# Altium PCB STM32.PcbDoc (part 5 of 10)
Units mil, origin at the board's own origin, x right, y up, seen from the top; angles counter-clockwise.
Board outline 3925 x 3925 mil, 2 copper layers (Top Layer, Bottom Layer); 152 components, 142 nets, 670 pads, 189 vias.
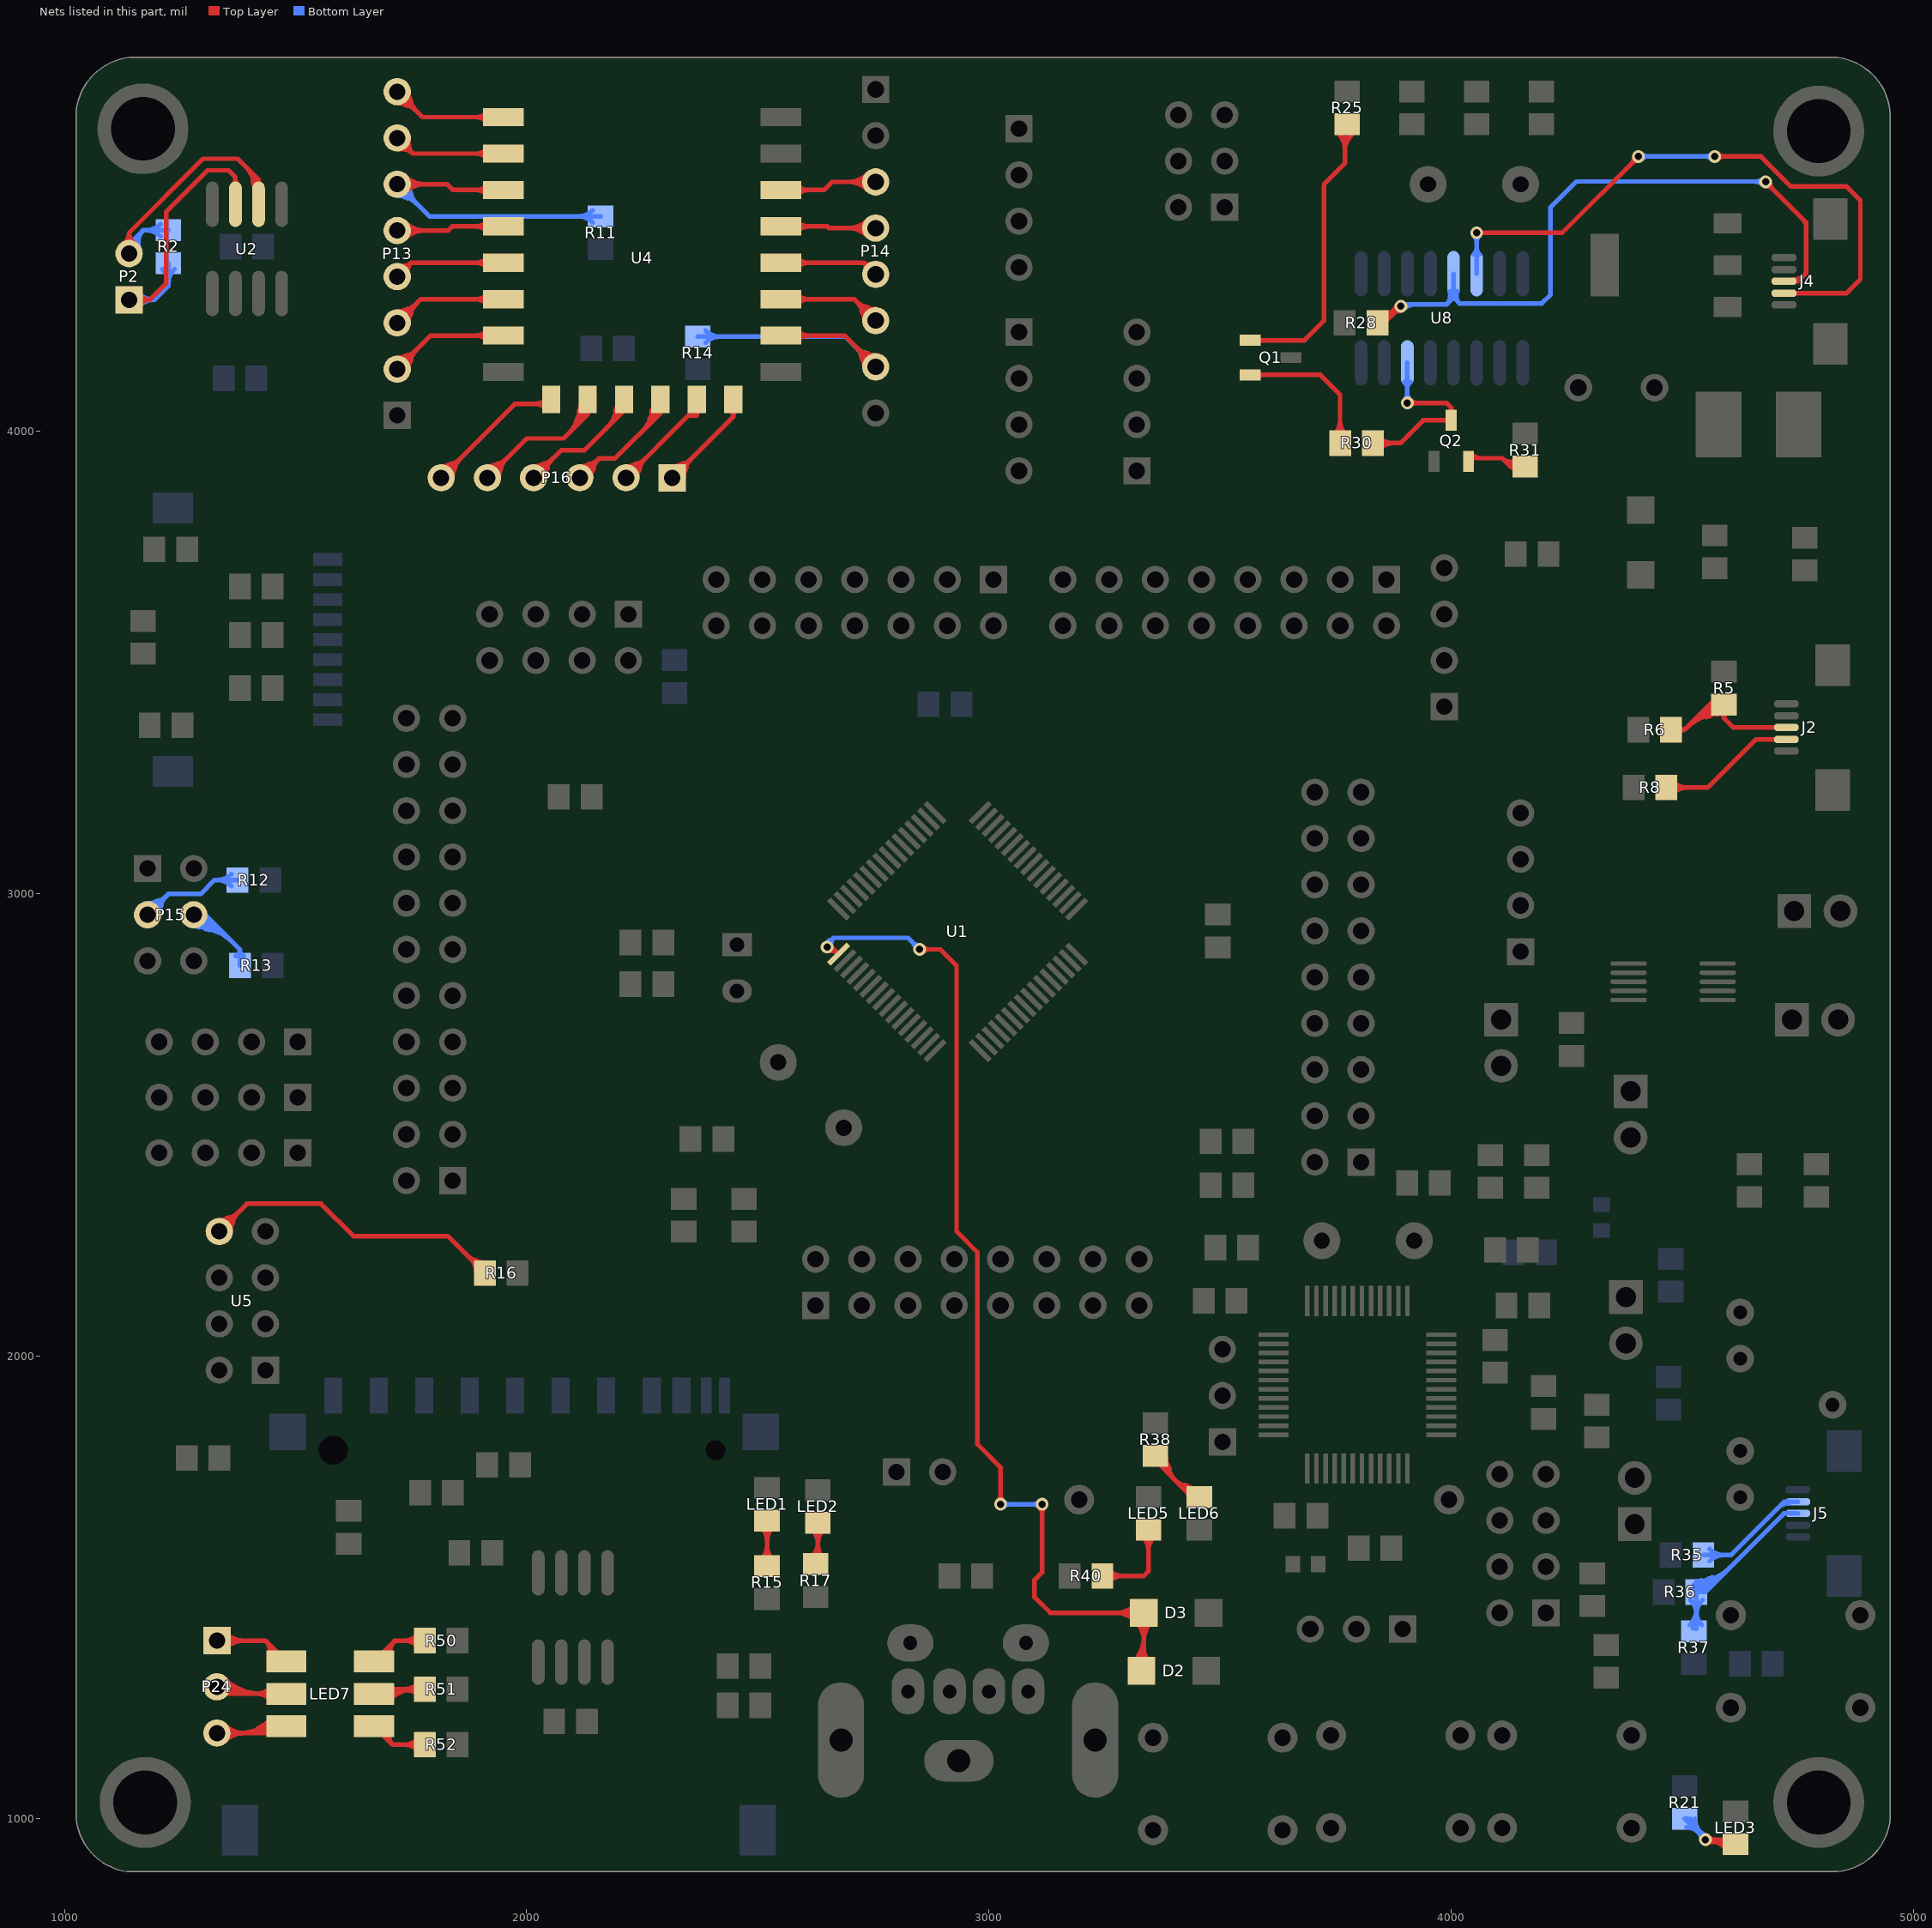
[diagram p5: the nets of this part, all layers, seen from the top]

## Via types
v1: diameter 27.56, hole 15.75, Top Layer to Bottom Layer, tented both sides, 185 vias
v2: diameter 39.37, hole 23.62, Top Layer to Bottom Layer, tented both sides, 3 vias
v3: diameter 39.37, hole 27.56, Top Layer to Bottom Layer, tented both sides, 1 vias

## Nets (pads, with @x,y where several pads share a name; then routed paths per layer and width w, separated by ;. In a path a pad name is that pad's centre, name@x,y a point inside that pad or via, vN(x,y) a via of type N, cw(c..) or ccw(c..) an arc to the next point about the centre after c; other vN are vias at no path point) (continued)
NetD2_2: D2.2 D3.2 U1.1 | length 3548.3
  Top Layer w10: v1@2649.12,2884.16 ccw(c2667.97,2902.07) 2667.3,2876.07 ; v1(2650,2885) 2660,2885 U1.1@2675,2870 ; v1(2850,2880) 2895,2880 2930,2845 2930,2270 2975,2225 2975,1810 3025,1760 v1(3025,1680) ; v1@2856.21,2873.79 cw(c2871.2,2858.8) 2871.2,2880 cw(c2871.2,2901.2) v1@2856.21,2886.21 ; v1(3115,1680) 3115,1532.52 3098.74,1516.26 3098.74,1479.12 3132.86,1445 D3.2@3335,1445 3335,1325 D2.2@3330,1320 ; U1.1@2675,2870 ccw(c2657.76,2852.76) 2652.05,2876.46 cw(c2657.76,2852.76) U1.1@2675,2870 ; 3025,1701.2 ccw(c3046.2,1701.2) 3031.21,1686.21 cw(c3046.2,1701.2) 3025,1701.2 ; 3025,1701.2 cw(c3003.8,1701.2) 3018.79,1686.21 ccw(c3003.8,1701.2) 3025,1701.2 ; 3115,1658.8 ccw(c3093.8,1658.8) 3108.79,1673.79 cw(c3093.8,1658.8) 3115,1658.8 ; 3115,1658.8 cw(c3136.2,1658.8) 3121.21,1673.79 ccw(c3136.2,1658.8) 3115,1658.8 ; 3274.64,1445 ccw(c3274.64,1505.36) 3317.32,1462.68 cw(c3274.64,1505.36) 3274.64,1445 ; 3274.64,1445 cw(c3274.64,1384.64) D3.2@3317.32,1427.32 ; 3274.64,1445 cw(c3274.64,1384.64) D3.2@3317.32,1427.32 ; 3298.79,1445 ccw(c3298.79,1481.21) 3324.39,1455.61 cw(c3298.79,1481.21) 3298.79,1445 ; 3298.79,1445 cw(c3298.79,1408.79) D3.2@3324.39,1434.39 ; 3298.79,1445 cw(c3298.79,1408.79) D3.2@3324.39,1434.39 ; D3.2@3317.32,1427.32 cw(c3274.64,1384.64) 3335,1384.64 ; D3.2@3317.32,1427.32 cw(c3274.64,1384.64) 3335,1384.64 ; D3.2@3324.39,1434.39 cw(c3298.79,1408.79) 3335,1408.79 ; D3.2@3324.39,1434.39 cw(c3298.79,1408.79) 3335,1408.79 ; 3335,1368.28 ccw(c3378.28,1368.28) 3347.68,1337.68 cw(c3378.28,1368.28) 3335,1368.28 ; 3335,1368.28 cw(c3281.72,1368.28) 3319.39,1330.61 ccw(c3281.72,1368.28) 3335,1368.28 ; 3335,1384.64 cw(c3395.36,1384.64) 3352.68,1427.32 ccw(c3395.36,1384.64) 3335,1384.64 ; 3335,1408.79 cw(c3371.21,1408.79) 3345.61,1434.39 ccw(c3371.21,1408.79) 3335,1408.79 ; D2.2@3312.32,1337.68 ccw(c3257.57,1392.43) 3335,1392.43 cw(c3257.57,1392.43) D2.2@3312.32,1337.68
  Bottom Layer w10: v1@2648.78,2885 cw(c2669.98,2885) 2654.99,2899.99 ; v1(2650,2885) 2650,2895 v1@2651.62,2896.62 ; v1@2653.76,2894.49 2664.27,2905 ; v1@2658.62,2886.65 cw(c2678.77,2890.5) 2664.27,2905 ; v1@2841.22,2880 ccw(c2820.02,2880) 2835.01,2894.99 ccw(c2850,2909.98) v1@2850,2888.78 ; v1(2850,2880) 2825,2905 2664.27,2905 ; v1(3025,1680) v1(3115,1680) ; 3046.2,1680 ccw(c3046.2,1658.8) 3031.21,1673.79 cw(c3046.2,1658.8) 3046.2,1680 ; 3046.2,1680 cw(c3046.2,1701.2) 3031.21,1686.21 ccw(c3046.2,1701.2) 3046.2,1680 ; 3093.8,1680 ccw(c3093.8,1701.2) 3108.79,1686.21 cw(c3093.8,1701.2) 3093.8,1680 ; 3093.8,1680 cw(c3093.8,1658.8) 3108.79,1673.79 ccw(c3093.8,1658.8) 3093.8,1680
NetJ2_2: J2.2 R8.2 | length 444.1
  Top Layer w10: R8.2@4465.43,3230 4555,3230 4659.41,3334.41 J2.2@4725,3334.41 ; 4510.39,3230 ccw(c4510.39,3185.04) 4478.6,3216.83 cw(c4510.39,3185.04) 4510.39,3230 ; 4510.39,3230 cw(c4510.39,3274.96) 4478.6,3243.17 ccw(c4510.39,3274.96) 4510.39,3230
NetJ2_3: J2.3 R5.2 R6.2 | length 1092
  Top Layer w10: R6.2@4475.43,3355 4505,3355 ; 4551.44,3391.67 ccw(c4540.4,3432.84) R5.2@4578.38,3413.48 ; 4551.52,3382.15 ccw(c4537.14,3438.63) R5.2@4587.25,3408.86 ; R5.2@4564.22,3395.09 cw(c4568.49,3379.13) R5.2@4576.75,3393.44 ; R5.2@4567.91,3413.73 cw(c4554.37,3416.84) 4557.97,3403.42 cw(c4561.08,3391.78) R5.2@4570.89,3398.77 ; R5.2@4574.92,3388.11 ccw(c4566.49,3421.19) R5.2@4595.85,3403.75 ; J2.3@4725,3360 4610,3360 4590,3380 ; 4505,3355 ccw(c4505,3340.84) 4492.23,3346.96 cw(c4505,3340.84) 4505,3355 ; 4505,3355 cw(c4505,3369.16) 4492.23,3363.05 ccw(c4505,3369.16) 4505,3355 ; 4505,3355 4559.56,3409.57 ; 4559.57,3409.57 ccw(c4559.57,3419.11) 4568.54,3415.88 cw(c4559.57,3419.11) 4559.57,3409.57 ; 4559.57,3409.57 cw(c4559.57,3400.02) 4568.54,3403.26 ccw(c4559.57,3400.02) 4559.57,3409.57 ; 4559.56,3409.57 R5.2@4590,3409.57 4590,3380 ; 4590,3380 ccw(c4575.84,3380) 4581.96,3392.77 cw(c4575.84,3380) 4590,3380 ; 4590,3380 cw(c4604.16,3380) 4598.05,3392.77 ccw(c4604.16,3380) 4590,3380 ; 4509.04,3359.04 cw(c4586.06,3282.01) 4586.06,3390.94 ccw(c4586.06,3282.01) 4509.04,3359.04 ; 4526.11,3376.11 cw(c4586.06,3316.15) 4586.06,3400.94 ccw(c4586.06,3316.15) 4526.11,3376.11 ; 4543.18,3393.18 cw(c4586.06,3350.29) 4586.06,3410.94 ccw(c4586.06,3350.29) 4543.18,3393.18 ; 4560.25,3410.25 cw(c4586.06,3384.43) 4586.06,3420.94 ccw(c4586.06,3384.43) 4560.25,3410.25
NetJ4_2: J4.2 U8.6 | length 1789.7
  Top Layer w10: v1(4055,4430) 4240,4430 v1(4405,4595) ; 4393.77,4585.85 cw(c4407.64,4582.13) v1@4404.76,4596.2 ; v1(4570,4595) 4670,4595 4735,4530 4855,4530 4885,4500 4885,4329.41 4855,4299.41 J4.2@4720,4299.41 ; 4390.01,4580.01 ccw(c4375.02,4595) 4396.22,4595 cw(c4375.02,4595) 4390.01,4580.01 ; 4390.01,4580.01 cw(c4405,4565.02) 4405,4586.22 ccw(c4405,4565.02) 4390.01,4580.01 ; 4591.2,4595 ccw(c4591.2,4573.8) 4576.21,4588.79 cw(c4591.2,4573.8) 4591.2,4595 ; 4591.2,4595 cw(c4591.2,4616.2) 4576.21,4601.21 ccw(c4591.2,4616.2) 4591.2,4595
  Bottom Layer w10: U8.6@4055,4341.46 v1(4055,4430) ; v1(4405,4595) v1(4570,4595) ; 4055,4398.08 ccw(c4076.2,4398.08) 4061.21,4383.1 cw(c4076.2,4398.08) 4055,4398.08 ; 4055,4398.08 cw(c4033.8,4398.08) 4048.79,4383.1 ccw(c4033.8,4398.08) 4055,4398.08 ; 4055,4408.8 ccw(c4033.8,4408.8) 4048.79,4423.79 cw(c4033.8,4408.8) 4055,4408.8 ; 4055,4408.8 cw(c4076.2,4408.8) 4061.21,4423.79 ccw(c4076.2,4408.8) 4055,4408.8 ; 4426.2,4595 ccw(c4426.2,4573.8) 4411.21,4588.79 cw(c4426.2,4573.8) 4426.2,4595 ; 4426.2,4595 cw(c4426.2,4616.2) 4411.21,4601.21 ccw(c4426.2,4616.2) 4426.2,4595 ; 4548.8,4595 ccw(c4548.8,4616.2) 4563.79,4601.21 cw(c4548.8,4616.2) 4548.8,4595 ; 4548.8,4595 cw(c4548.8,4573.8) 4563.79,4588.79 ccw(c4548.8,4573.8) 4548.8,4595
NetJ4_3: J4.3 R28.1 U8.5 | length 2652
  Top Layer w10: R28.1@3831.97,4246.55 cw(c3857.21,4223.84) R28.1@3855.42,4257.74 ; R28.1@3840.43,4235 3840.43,4248 3868,4248 v1(3891,4271) ; 3870.37,4252.23 cw(c3887.95,4242.08) v1@3890.08,4262.27 ; 3874.59,4259.53 cw(c3882.71,4254.84) v1@3886.99,4263.19 ; 3878.07,4265.56 cw(c3889.72,4258.84) v1@3891.13,4272.21 ; 3879.77,4261.85 cw(c3893.64,4258.13) v1@3890.76,4272.2 ; 3881.85,4259.77 ccw(c3878.13,4273.64) v1@3892.2,4270.76 ; v1@4678.8,4539.76 ccw(c4692.87,4542.64) 4689.15,4528.77 ; v1(4680,4540) 4765,4455 4765,4452.21 ; v1@4680.24,4541.2 cw(c4677.36,4527.13) 4691.23,4530.85 ; J4.3@4720,4325 4750,4325 4767.33,4342.33 4767.33,4452.21 ; J4.3@4741.19,4323.56 cw(c4755.41,4315.35) 4751.16,4331.21 ; 3865.06,4250.51 ccw(c3846.32,4282.97) v1@3882.52,4273.27 ; 3865.06,4250.51 ccw(c3846.32,4282.97) v1@3882.52,4273.27 ; 3865.06,4250.51 ccw(c3846.32,4282.97) v1@3882.52,4273.27 ; 3872.64,4260.4 ccw(c3862.04,4278.76) v1@3882.52,4273.27 ; 3872.65,4260.4 cw(c3883.24,4242.05) v1@3888.73,4262.52 ; 3872.64,4260.4 ccw(c3862.04,4278.76) v1@3882.52,4273.27 ; 3872.65,4260.4 cw(c3883.24,4242.05) v1@3888.73,4262.52 ; 3872.64,4260.4 ccw(c3862.04,4278.76) v1@3882.52,4273.27 ; 3872.65,4260.4 cw(c3883.24,4242.05) v1@3888.73,4262.52 ; 3875.58,4256.59 ccw(c3868.79,4268.36) v1@3882.28,4269.96 ; 3875.58,4256.59 ccw(c3868.79,4268.36) v1@3882.28,4269.96 ; 3875.58,4256.59 ccw(c3868.79,4268.36) v1@3882.28,4269.96 ; 3876.01,4256.01 ccw(c3861.02,4271) 3882.22,4271 cw(c3861.02,4271) 3876.01,4256.01 ; 3876.01,4256.01 cw(c3891,4241.02) 3891,4262.22 ccw(c3891,4241.02) 3876.01,4256.01 ; v1(3891,4271) cw(c3854.89,4307.1) 3844.3,4257.15 ccw(c3854.89,4307.1) v1(3891,4271) ; 4694.99,4525.01 ccw(c4680,4510.02) 4680,4531.22 cw(c4680,4510.02) 4694.99,4525.01 ; 4694.99,4525.01 cw(c4709.98,4540) 4688.78,4540 ccw(c4709.98,4540) 4694.99,4525.01 ; R28.1@3840.15,4237.59 ccw(c3845.77,4264.11) 3864.94,4244.94 cw(c3845.77,4264.11) R28.1@3840.15,4237.59 ; R28.1@3842.22,4247.37 ccw(c3850.33,4285.61) 3877.97,4257.97 cw(c3850.33,4285.61) R28.1@3842.22,4247.37 ; R28.1@3853.6,4252.1 ccw(c3863.51,4262.01) 3863.51,4248 cw(c3863.51,4262.01) R28.1@3853.6,4252.1 ; J4.3@4738.7,4327.87 ccw(c4738.7,4362.09) 4762.9,4337.9 cw(c4738.7,4362.09) J4.3@4738.7,4327.87
  Bottom Layer w10: v1(3891,4271) 3895,4275 3990,4275 ; 3997.58,4288.02 cw(c4023.54,4289.58) U8.5@4004.09,4306.83 ; U8.5@4005,4341.46 4005,4290 ; v1@4680,4541 4271,4541 4215,4485 4215,4296 4196,4277 4018,4277 ; 3990,4275 ccw(c3970.48,4294.52) 3996.67,4303.25 cw(c3970.48,4294.52) 3990,4275 ; 3990,4275 4005,4290 ; 4005,4290 ccw(c3994.77,4290) 4000.28,4298.62 cw(c3994.77,4290) 4005,4290 ; 4005,4290 cw(c4015.23,4290) 4009.72,4298.62 ccw(c4015.23,4290) 4005,4290 ; 4005,4290 4018,4277 ; 4018,4277 cw(c4034.42,4293.43) 4013.07,4302.57 ccw(c4034.42,4293.43) 4018,4277 ; v1@3897.21,4264.79 cw(c3921.85,4240.15) 3921.85,4275 ccw(c3921.85,4240.15) v1@3897.21,4264.79 ; 4001.44,4286.44 ccw(c3987.65,4300.24) 4006.16,4306.41 cw(c3987.65,4300.24) 4001.44,4286.44 ; U8.5@4003.88,4306.5 ccw(c4019.79,4299.69) 4007.55,4287.45 cw(c4019.79,4299.69) U8.5@4003.88,4306.5 ; 4656.39,4541 cw(c4656.39,4516.39) 4673.79,4533.79 ccw(c4656.39,4516.39) 4656.39,4541 ; 4661.22,4541 ccw(c4661.22,4558.78) 4673.79,4546.21 cw(c4661.22,4558.78) 4661.22,4541
NetJ5_2: J5.2 R35.1 | length 458.1
  Bottom Layer w10: R35.1@4545.43,1570 4605,1570 4720.59,1685.59 J5.2@4750,1685.59 ; 4718.84,1679.38 ccw(c4714.59,1695.24) J5.2@4728.81,1687.03 ; 4590.39,1570 ccw(c4590.39,1525.04) 4558.6,1556.83 cw(c4590.39,1525.04) 4590.39,1570 ; 4590.39,1570 cw(c4590.39,1614.96) 4558.6,1583.17 ccw(c4590.39,1614.96) 4590.39,1570 ; 4708.11,1673.11 cw(c4731.3,1649.92) 4731.3,1682.72 ccw(c4731.3,1649.92) 4708.11,1673.11
NetJ5_3: J5.3 R36.1 R37.1 | length 1191
  Bottom Layer w10: R36.1@4520.57,1499.62 cw(c4549.94,1482.7) R36.1@4541.17,1515.44 ; R36.1@4529.24,1494.62 cw(c4579.46,1465.7) 4564.46,1521.68 ; R37.1@4530.43,1410.87 R36.1@4530.43,1490 4549.72,1490 4719.72,1660 J5.3@4750,1660 ; R36.1@4538.31,1490.44 cw(c4572.16,1475.4) 4562.57,1511.17 ; R36.1@4539.74,1510.06 ccw(c4548.01,1524.37) R36.1@4552.28,1508.41 ; R36.1@4547.03,1502.39 ccw(c4552.88,1505.37) 4554.58,1499.03 ccw(c4556.54,1491.71) R36.1@4548.99,1492.35 ; 4530.43,1441.11 ccw(c4485.48,1441.11) 4517.27,1472.9 cw(c4485.48,1441.11) 4530.43,1441.11 ; 4530.43,1441.11 cw(c4575.39,1441.11) 4543.6,1472.9 ccw(c4575.39,1441.11) 4530.43,1441.11 ; R37.1@4515.77,1418.6 ccw(c4480.37,1454.01) 4530.43,1454.01 cw(c4480.37,1454.01) R37.1@4515.77,1418.6 ; R37.1@4522.84,1411.53 ccw(c4504.51,1429.86) 4530.43,1429.86 cw(c4504.51,1429.86) R37.1@4522.84,1411.53 ; 4530.43,1446.78 ccw(c4570.28,1446.78) 4542.1,1418.6 cw(c4570.28,1446.78) 4530.43,1446.78 ; R36.1@4530.43,1492.56 ccw(c4530.43,1545.3) 4567.73,1508.01 cw(c4530.43,1545.3) R36.1@4530.43,1492.56 ; R36.1@4530.43,1502.56 ccw(c4530.43,1579.44) 4584.8,1525.08 cw(c4530.43,1579.44) R36.1@4530.43,1502.56 ; R36.1@4530.43,1512.56 ccw(c4530.43,1613.58) 4601.87,1542.15 cw(c4530.43,1613.58) R36.1@4530.43,1512.56
NetLED1_1: LED1.1 R15.2 | length 381.2
  Top Layer w10: R15.2@2520,1545.87 LED1.1@2520,1644.57 ; 2520,1590.82 ccw(c2564.96,1590.82) 2533.17,1559.03 cw(c2564.96,1590.82) 2520,1590.82 ; 2520,1590.82 cw(c2475.04,1590.82) 2506.83,1559.03 ccw(c2475.04,1590.82) 2520,1590.82 ; 2520,1599.61 ccw(c2475.04,1599.61) 2506.83,1631.4 cw(c2475.04,1599.61) 2520,1599.61 ; 2520,1599.61 cw(c2564.96,1599.61) 2533.17,1631.4 ccw(c2564.96,1599.61) 2520,1599.61
NetLED2_1: LED2.1 R17.2 | length 366.6
  Top Layer w10: R17.2@2630,1555.43 LED2.1@2630,1639.57 ; 2630,1594.61 ccw(c2585.04,1594.61) 2616.83,1626.4 cw(c2585.04,1594.61) 2630,1594.61 ; 2630,1594.61 cw(c2674.96,1594.61) 2643.17,1626.4 ccw(c2674.96,1594.61) 2630,1594.61 ; R17.2@2615.77,1563.6 ccw(c2581.41,1597.96) 2630,1597.96 cw(c2581.41,1597.96) R17.2@2615.77,1563.6 ; 2630,1592.83 ccw(c2671.33,1592.83) 2642.1,1563.6 cw(c2671.33,1592.83) 2630,1592.83
NetLED3_1: LED3.1 R21.2 | length 1301.5
  Top Layer w10: v1(4550,954.57) cw(c4550,893.75) LED3.1@4596.75,932.66 ; v1(4550,954.57) cw(c4550,893.75) LED3.1@4596.75,932.66 ; v1(4550,954.57) cw(c4550,893.75) LED3.1@4596.75,932.66 ; v1(4550,954.57) cw(c4550,893.75) LED3.1@4596.75,932.66 ; v1(4550,954.57) 4615,954.57 v1(4550,954.57) ; v1@4554.39,946.96 cw(c4564.99,928.61) 4570.48,949.08 ; v1@4554.39,946.96 cw(c4564.99,928.61) 4570.48,949.08 ; v1@4554.39,946.96 cw(c4564.99,928.61) 4570.48,949.08 ; v1@4554.39,946.96 cw(c4564.99,928.61) 4570.48,949.08 ; v1@4554.39,946.96 cw(c4564.99,928.61) 4570.48,949.08 ; v1@4554.39,946.96 cw(c4564.99,928.61) 4570.48,949.08 ; v1@4556.21,948.36 cw(c4571.2,933.37) 4571.2,954.57 ; v1@4556.21,948.36 cw(c4571.2,933.37) 4571.2,954.57 ; v1@4556.21,948.36 cw(c4571.2,933.37) 4571.2,954.57 ; v1@4556.21,948.36 cw(c4571.2,933.37) 4571.2,954.57 ; v1@4556.21,960.78 ccw(c4571.2,975.76) 4571.2,954.57 ; v1@4556.21,960.78 ccw(c4571.2,975.76) 4571.2,954.57 ; v1@4556.21,960.78 ccw(c4571.2,975.76) 4571.2,954.57 ; v1@4556.21,960.78 ccw(c4571.2,975.76) 4571.2,954.57 ; v1@4557.6,958.96 ccw(c4575.96,969.55) 4570.47,949.08 ; v1@4557.6,958.96 ccw(c4575.96,969.55) 4570.47,949.08 ; v1@4557.6,958.96 ccw(c4575.96,969.55) 4570.47,949.08 ; v1@4557.6,958.96 ccw(c4575.96,969.55) 4570.47,949.08 ; v1@4557.6,958.96 ccw(c4575.96,969.55) 4570.47,949.08 ; v1@4557.6,958.96 ccw(c4575.96,969.55) 4570.47,949.08 ; 4571.34,954.57 cw(c4571.34,911.5) LED3.1@4604.44,939.05 ; 4571.34,954.57 cw(c4571.34,911.5) LED3.1@4604.44,939.05 ; 4571.34,954.57 cw(c4571.34,911.5) LED3.1@4604.44,939.05 ; 4571.34,954.57 cw(c4571.34,911.5) LED3.1@4604.44,939.05
  Bottom Layer w10: R21.2@4505,999.57 v1(4550,954.57) ; R21.2@4509.31,1000.9 cw(c4499.85,967) 4533.85,976.1 ; 4534.9,973.08 cw(c4527.74,960.69) v1@4541.54,956.9 ; 4534.48,976.7 ccw(c4559.86,991.36) v1@4552.27,963.05 ; 4534.48,976.7 ccw(c4559.86,991.36) v1@4552.27,963.05 ; 4534.48,976.7 ccw(c4559.86,991.36) v1@4552.27,963.05 ; 4535.01,969.56 ccw(c4550,984.54) 4550,963.35 cw(c4550,984.54) 4535.01,969.56 ; 4535.01,969.56 cw(c4520.02,954.57) 4541.22,954.57 ccw(c4520.02,954.57) 4535.01,969.56 ; 4540.21,966.77 cw(c4528.88,960.23) v1@4541.52,956.84 ; 4540.21,966.77 cw(c4528.88,960.23) v1@4541.52,956.84 ; 4540.21,966.77 cw(c4528.88,960.23) v1@4541.52,956.84 ; R21.2@4508.94,980.95 cw(c4508.94,945.49) 4534.01,970.56 ccw(c4508.94,945.49) R21.2@4508.94,980.95 ; R21.2@4517.56,999.57 ccw(c4547.88,999.57) 4526.44,978.13 cw(c4547.88,999.57) R21.2@4517.56,999.57 ; R21.2@4527.56,999.57 ccw(c4582.02,999.57) 4543.51,961.06 cw(c4582.02,999.57) R21.2@4527.56,999.57
NetLED5_2: LED5.2 R40.2 | length 475.8
  Top Layer w10: R40.2@3245.43,1525 3335,1525 3345,1535 LED5.2@3345,1624.57 ; 3290.39,1525 ccw(c3290.39,1480.04) 3258.6,1511.83 cw(c3290.39,1480.04) 3290.39,1525 ; 3290.39,1525 cw(c3290.39,1569.96) 3258.6,1538.17 ccw(c3290.39,1569.96) 3290.39,1525 ; 3345,1579.61 ccw(c3300.04,1579.61) 3331.83,1611.4 cw(c3300.04,1579.61) 3345,1579.61 ; 3345,1579.61 cw(c3389.96,1579.61) 3358.17,1611.4 ccw(c3389.96,1579.61) 3345,1579.61
NetLED6_2: LED6.2 R38.1 | length 1436.3
  Top Layer w10: LED6.2@3455,1695.43 LED6.2@3439.13,1695.43 ; R38.1@3372.56,1784.57 ccw(c3427.02,1784.57) 3388.51,1746.06 ; R38.1@3372.56,1784.57 ccw(c3427.02,1784.57) 3388.51,1746.06 ; R38.1@3372.56,1784.57 ccw(c3427.02,1784.57) 3388.51,1746.06 ; R38.1@3372.56,1784.57 ccw(c3427.02,1784.57) 3388.51,1746.06 ; R38.1@3382.56,1784.57 ccw(c3461.16,1784.57) 3405.58,1728.99 ; R38.1@3382.56,1784.57 ccw(c3461.16,1784.57) 3405.58,1728.99 ; R38.1@3382.56,1784.57 ccw(c3461.16,1784.57) 3405.58,1728.99 ; R38.1@3382.56,1784.57 ccw(c3461.16,1784.57) 3405.58,1728.99 ; 3398.91,1735.66 ccw(c3451.06,1787.81) LED6.2@3451.06,1714.06 ; 3398.91,1735.66 ccw(c3451.06,1787.81) LED6.2@3451.06,1714.06 ; 3398.91,1735.66 ccw(c3451.06,1787.81) LED6.2@3451.06,1714.06 ; 3398.91,1735.66 ccw(c3451.06,1787.81) LED6.2@3451.06,1714.06 ; 3415.98,1718.59 ccw(c3451.06,1753.67) LED6.2@3451.06,1704.06 ; 3415.98,1718.59 ccw(c3451.06,1753.67) LED6.2@3451.06,1704.06 ; 3415.98,1718.59 ccw(c3451.06,1753.67) LED6.2@3451.06,1704.06 ; 3415.98,1718.59 ccw(c3451.06,1753.67) LED6.2@3451.06,1704.06 ; LED6.2@3427.71,1706.86 cw(c3416.28,1695.43) LED6.2@3432.44,1695.43 ; LED6.2@3427.71,1706.86 cw(c3416.28,1695.43) LED6.2@3432.44,1695.43 ; LED6.2@3427.71,1706.86 cw(c3416.28,1695.43) LED6.2@3432.44,1695.43 ; LED6.2@3427.71,1706.86 cw(c3416.28,1695.43) LED6.2@3432.44,1695.43 ; LED6.2@3439.13,1695.43 3350,1784.57 LED6.2@3439.13,1695.43 ; R38.1@3362,1776.17 cw(c3356.76,1753.44) 3379.28,1759.48 ccw(c3356.76,1753.44) R38.1@3362,1776.17 ; R38.1@3364.5,1785.83 cw(c3345.79,1743.7) 3390.31,1755.63 ccw(c3345.79,1743.7) R38.1@3364.5,1785.83 ; R38.1@3378.41,1762.72 cw(c3394.37,1767) 3380.06,1775.26 ccw(c3394.37,1767) R38.1@3378.41,1762.72 ; 3423.22,1721.52 cw(c3411.9,1679.25) 3452.34,1695.96 ccw(c3411.9,1679.25) 3423.22,1721.52 ; LED6.2@3427.5,1710.37 cw(c3422.12,1690.31) 3442.57,1693.93 ccw(c3422.12,1690.31) LED6.2@3427.5,1710.37 ; LED6.2@3429.21,1709.91 ccw(c3433.49,1725.87) 3441.75,1711.56 cw(c3433.49,1725.87) LED6.2@3429.21,1709.91
NetLED7_1: LED7.1 P24.1 | length 699.9
  Top Layer w10: P24.1@1330,1385 1435,1385 ; 1445.27,1367.15 ccw(c1474.04,1363.92) LED7.1@1459.63,1338.8 ; LED7.1@1480,1340 1435,1385 ; 1365.07,1385 ccw(c1365.07,1349.93) 1340.27,1374.73 cw(c1365.07,1349.93) 1365.07,1385 ; 1365.07,1385 cw(c1365.07,1420.07) 1340.27,1395.27 ccw(c1365.07,1420.07) 1365.07,1385 ; 1389.21,1385 ccw(c1389.21,1325.79) 1347.34,1367.66 cw(c1389.21,1325.79) 1389.21,1385 ; 1389.21,1385 cw(c1389.21,1444.21) 1347.34,1402.34 ccw(c1389.21,1444.21) 1389.21,1385 ; 1435,1385 cw(c1409.81,1359.8) 1442.98,1346.8 ccw(c1409.81,1359.8) 1435,1385 ; 1445.8,1374.2 cw(c1425.33,1353.72) 1452.29,1343.15 ccw(c1425.33,1353.72) 1445.8,1374.2 ; LED7.1@1456.61,1363.39 cw(c1440.85,1347.63) 1461.6,1339.5 ccw(c1440.85,1347.63) LED7.1@1456.61,1363.39
NetLED7_2: LED7.2 P24.2 | length 771.8
  Top Layer w10: P24.2@1330,1285 1345,1270 LED7.2@1480,1270 ; P24.2@1342.24,1277.18 cw(c1355.2,1268.91) 1362.88,1282.22 ; P24.2@1350.41,1271.4 cw(c1355.7,1267.88) 1358.87,1273.38 cw(c1363.42,1281.27) P24.2@1354.38,1282.28 ; P24.2@1350.67,1271.8 cw(c1364.02,1263.28) 1371.94,1276.99 ; 1415.36,1270 ccw(c1415.36,1314.96) 1447.15,1283.17 cw(c1415.36,1314.96) 1415.36,1270 ; 1415.36,1270 cw(c1415.36,1225.04) 1447.15,1256.83 ccw(c1415.36,1225.04) 1415.36,1270 ; P24.2@1333.2,1288.2 ccw(c1377.14,1332.14) 1377.14,1270 cw(c1377.14,1332.14) P24.2@1333.2,1288.2 ; P24.2@1340.27,1295.27 ccw(c1401.29,1356.29) 1401.29,1270 cw(c1401.29,1356.29) P24.2@1340.27,1295.27 ; P24.2@1347.34,1302.34 ccw(c1425.43,1380.43) 1425.43,1270 cw(c1425.43,1380.43) P24.2@1347.34,1302.34
NetLED7_3: LED7.3 P24.3 | length 917.6
  Top Layer w10: P24.3@1330,1185 1465,1185 LED7.3@1480,1200 ; 1417.54,1194.79 cw(c1428.37,1177.34) LED7.3@1445.13,1189.22 ; 1426.09,1189.86 cw(c1434.69,1174.96) LED7.3@1447,1186.98 ; 1426.58,1200.4 cw(c1437.06,1183.5) LED7.3@1453.28,1195.01 ; 1434.63,1194.79 ccw(c1426.37,1209.1) LED7.3@1442.33,1204.82 ; 1435.61,1206.01 cw(c1445.75,1189.67) LED7.3@1461.44,1200.8 ; 1365.07,1185 ccw(c1365.07,1149.93) 1340.27,1174.73 cw(c1365.07,1149.93) 1365.07,1185 ; 1365.07,1185 cw(c1365.07,1220.07) 1340.27,1195.27 ccw(c1365.07,1220.07) 1365.07,1185 ; 1389.21,1185 ccw(c1389.21,1125.79) 1347.34,1167.66 cw(c1389.21,1125.79) 1389.21,1185 ; 1389.21,1185 cw(c1389.21,1244.21) 1347.34,1202.34 ccw(c1389.21,1244.21) 1389.21,1185 ; 1379.14,1185 ccw(c1379.14,1281.17) 1447.15,1213.17 cw(c1379.14,1281.17) 1379.14,1185 ; 1403.29,1185 ccw(c1403.29,1257.03) 1454.22,1206.1 cw(c1403.29,1257.03) 1403.29,1185 ; 1427.43,1185 ccw(c1427.43,1232.89) 1461.29,1199.03 cw(c1427.43,1232.89) 1427.43,1185
NetLED7_4: LED7.4 R50.2 | length 504.5
  Top Layer w10: LED7.4@1670,1340 1715,1385 ; LED7.4@1690.37,1338.8 ccw(c1675.96,1363.92) 1704.73,1367.15 ; R50.2@1779.57,1385 1715,1385 ; 1715,1385 ccw(c1740.19,1359.8) 1707.02,1346.8 cw(c1740.19,1359.8) 1715,1385 ; 1734.61,1385 ccw(c1734.61,1429.96) 1766.4,1398.17 cw(c1734.61,1429.96) 1734.61,1385 ; 1734.61,1385 cw(c1734.61,1340.04) 1766.4,1371.83 ccw(c1734.61,1340.04) 1734.61,1385 ; LED7.4@1688.4,1339.5 cw(c1709.15,1347.63) 1693.39,1363.39 ccw(c1709.15,1347.63) LED7.4@1688.4,1339.5 ; LED7.4@1697.71,1343.15 cw(c1724.67,1353.72) 1704.2,1374.2 ccw(c1724.67,1353.72) LED7.4@1697.71,1343.15
NetLED7_5: LED7.5 R51.2 | length 570
  Top Layer w10: LED7.5@1680,1280 R51.2@1779.57,1280 ; LED7.5@1707.67,1265.18 cw(c1723.63,1260.9) 1715.37,1275.21 ; 1734.61,1280 ccw(c1734.61,1324.96) 1766.4,1293.17 cw(c1734.61,1324.96) 1734.61,1280 ; 1734.61,1280 cw(c1734.61,1235.04) 1766.4,1266.83 ccw(c1734.61,1235.04) 1734.61,1280 ; 1744.63,1277 cw(c1748.02,1261.03) R51.2@1762.76,1268.05 ; 1744.63,1277 cw(c1748.02,1261.03) R51.2@1762.76,1268.05 ; 1744.63,1277 cw(c1748.02,1261.03) R51.2@1762.76,1268.05 ; 1753.18,1278.81 ccw(c1749.63,1295.52) R51.2@1763.95,1286.21 ; 1753.18,1278.81 ccw(c1749.63,1295.52) R51.2@1763.95,1286.21 ; 1753.18,1278.81 ccw(c1749.63,1295.52) R51.2@1763.95,1286.21 ; LED7.5@1695.78,1263.9 cw(c1734.64,1225.04) 1734.64,1280 ccw(c1734.64,1225.04) LED7.5@1695.78,1263.9 ; LED7.5@1702.85,1256.83 cw(c1758.78,1200.9) 1758.78,1280 ccw(c1758.78,1200.9) LED7.5@1702.85,1256.83
NetLED7_6: LED7.6 R52.2 | length 391.5
  Top Layer w10: LED7.6@1670,1200 1710,1160 ; R52.2@1779.57,1160 1710,1160 ; 1710,1160 cw(c1728.1,1178.1) 1705.86,1190.78 ccw(c1728.1,1178.1) 1710,1160 ; 1734.61,1160 ccw(c1734.61,1204.96) 1766.4,1173.17 cw(c1734.61,1204.96) 1734.61,1160 ; 1734.61,1160 cw(c1734.61,1115.04) 1766.4,1146.83 ccw(c1734.61,1115.04) 1734.61,1160 ; LED7.6@1697.18,1195.73 ccw(c1716.29,1184.83) 1700.73,1169.27 cw(c1716.29,1184.83) LED7.6@1697.18,1195.73
NetP2_1: P2.1 R2.1 U2.7 | length 1236.1
  Top Layer w10: P2.1@1140,4285 1185,4285 ; U2.7@1370,4491.46 1370,4550 1355,4565 1310,4565 1220,4475 1220,4320 1185,4285 ; 1185,4285 ccw(c1185,4255.99) 1160.61,4271.71 cw(c1185,4255.99) 1185,4285 ; 1185,4285 cw(c1185,4314.01) 1160.61,4298.29 ccw(c1185,4314.01) 1185,4285 ; 1370,4548.08 ccw(c1391.2,4548.08) 1376.21,4533.1 cw(c1391.2,4548.08) 1370,4548.08 ; 1370,4548.08 cw(c1348.8,4548.08) 1363.79,4533.1 ccw(c1348.8,4548.08) 1370,4548.08
  Bottom Layer w10: P2.1@1140,4285 1195,4285 ; R2.1@1225,4364.57 1225,4315 1195,4285 ; 1172.57,4285 ccw(c1172.57,4255.74) 1150.81,4275.29 cw(c1172.57,4255.74) 1172.57,4285 ; 1172.57,4285 cw(c1172.57,4314.26) 1150.81,4294.71 ccw(c1172.57,4314.26) 1172.57,4285 ; 1195,4285 ccw(c1195,4235.61) 1158.25,4268.61 cw(c1195,4235.61) 1195,4285 ; 1195,4285 cw(c1195,4334.39) 1158.25,4301.39 ccw(c1195,4334.39) 1195,4285 ; 1225,4319.61 ccw(c1180.04,4319.61) 1211.83,4351.4 cw(c1180.04,4319.61) 1225,4319.61 ; 1225,4319.61 cw(c1269.96,4319.61) 1238.17,4351.4 ccw(c1269.96,4319.61) 1225,4319.61
NetP2_2: P2.2 R2.2 U2.6 | length 1325.5
  Top Layer w10: P2.2@1140,4385 1140,4430 ; 1407.27,4541.62 ccw(c1432.39,4548.35) U2.6@1419.39,4525.83 ; U2.6@1413.37,4532.64 ccw(c1402.91,4541.72) 1416.29,4545.3 ; 1416.39,4544.92 ccw(c1432.97,4549.36) U2.6@1424.39,4534.49 ; U2.6@1420,4491.46 1420,4545 ; 1140,4430 ccw(c1169.01,4430) 1153.29,4405.61 cw(c1169.01,4430) 1140,4430 ; 1140,4430 cw(c1110.99,4430) 1126.71,4405.61 ccw(c1110.99,4430) 1140,4430 ; 1140,4430 1300,4590 1375,4590 1420,4545 ; 1420,4545 ccw(c1434.29,4545) 1425.44,4533.78 cw(c1434.29,4545) 1420,4545 ; 1420,4545 cw(c1405.71,4545) 1414.56,4533.78 ccw(c1405.71,4545) 1420,4545 ; 1392.21,4572.79 cw(c1346.3,4526.89) 1411.22,4526.89 ccw(c1346.3,4526.89) 1392.21,4572.79 ; 1409.28,4555.72 cw(c1380.44,4526.89) 1421.22,4526.89 ccw(c1380.44,4526.89) 1409.28,4555.72
  Bottom Layer w10: P2.2@1140,4385 1140,4405 1170.43,4435.43 ; R2.2@1225,4435.43 1170.43,4435.43 ; 1170.43,4435.43 ccw(c1196.65,4409.21) 1162.55,4394.64 cw(c1196.65,4409.21) 1170.43,4435.43 ; 1176.11,4435.43 ccw(c1176.11,4480.39) 1207.9,4448.6 cw(c1176.11,4480.39) 1176.11,4435.43 ; 1176.11,4435.43 cw(c1176.11,4390.48) 1207.9,4422.27 ccw(c1176.11,4390.48) 1176.11,4435.43 ; P2.2@1144.16,4386.78 cw(c1167.35,4396.69) 1149.52,4414.52 ccw(c1167.35,4396.69) P2.2@1144.16,4386.78 ; P2.2@1153.36,4390.71 cw(c1182,4402.95) 1159.98,4424.98 ccw(c1182,4402.95) P2.2@1153.36,4390.71
NetP13_2: P13.2 U4.16 | length 752.5
  Top Layer w10: P13.2@1714.64,4136.1 cw(c1752.3,4128.39) 1742.35,4165.52 ; P13.2@1720,4135 1792.56,4207.56 U4.16@1949.76,4207.56 ; P13.2@1721.1,4129.64 ccw(c1713.39,4167.3) 1750.52,4157.35 ; 1744.8,4159.8 ccw(c1769.6,4135) 1734.53,4135 cw(c1769.6,4135) 1744.8,4159.8 ; 1744.8,4159.8 cw(c1720,4184.6) 1720,4149.53 ccw(c1720,4184.6) 1744.8,4159.8 ; 1761.87,4176.87 ccw(c1803.74,4135) 1744.53,4135 cw(c1803.74,4135) 1761.87,4176.87 ; 1761.87,4176.87 cw(c1720,4218.74) 1720,4159.53 ccw(c1720,4218.74) 1761.87,4176.87 ; 1889.7,4207.56 ccw(c1889.7,4243.01) 1914.77,4217.94 cw(c1889.7,4243.01) 1889.7,4207.56 ; 1889.7,4207.56 cw(c1889.7,4172.11) 1914.77,4197.18 ccw(c1889.7,4172.11) 1889.7,4207.56
NetP13_3: P13.3 U4.17 | length 743.7
  Top Layer w10: P13.3@1714.64,4236.1 cw(c1752.3,4228.39) 1742.35,4265.52 ; P13.3@1720,4235 1771.3,4286.3 U4.17@1949.76,4286.3 ; P13.3@1721.1,4229.64 ccw(c1713.39,4267.3) 1750.52,4257.35 ; 1744.8,4259.8 ccw(c1769.6,4235) 1734.53,4235 cw(c1769.6,4235) 1744.8,4259.8 ; 1744.8,4259.8 cw(c1720,4284.6) 1720,4249.53 ccw(c1720,4284.6) 1744.8,4259.8 ; 1761.87,4276.87 ccw(c1803.74,4235) 1744.53,4235 cw(c1803.74,4235) 1761.87,4276.87 ; 1761.87,4276.87 cw(c1720,4318.74) 1720,4259.53 ccw(c1720,4318.74) 1761.87,4276.87 ; 1889.7,4286.3 ccw(c1889.7,4321.75) 1914.77,4296.68 cw(c1889.7,4321.75) 1889.7,4286.3 ; 1889.7,4286.3 cw(c1889.7,4250.85) 1914.77,4275.92 ccw(c1889.7,4250.85) 1889.7,4286.3
NetP13_4: P13.4 U4.18 | length 456.3
  Top Layer w10: P13.4@1720,4335 1750.04,4365.04 ; U4.18@1949.76,4365.04 1750.04,4365.04 ; 1750.04,4365.04 ccw(c1767.38,4347.7) 1743.69,4341.35 cw(c1767.38,4347.7) 1750.04,4365.04 ; 1750.04,4365.04 cw(c1732.7,4382.38) 1726.35,4358.69 ccw(c1732.7,4382.38) 1750.04,4365.04 ; 1889.7,4365.04 ccw(c1889.7,4400.49) 1914.77,4375.42 cw(c1889.7,4400.49) 1889.7,4365.04 ; 1889.7,4365.04 cw(c1889.7,4329.59) 1914.77,4354.66 ccw(c1889.7,4329.59) 1889.7,4365.04
NetP13_5: P13.5 U4.19 | length 641
  Top Layer w10: P13.5@1720,4435 1830,4435 1838.78,4443.78 U4.19@1949.76,4443.78 ; 1755.07,4435 ccw(c1755.07,4399.93) 1730.27,4424.73 cw(c1755.07,4399.93) 1755.07,4435 ; 1755.07,4435 cw(c1755.07,4470.07) 1730.27,4445.27 ccw(c1755.07,4470.07) 1755.07,4435 ; 1779.21,4435 ccw(c1779.21,4375.79) 1737.34,4417.66 cw(c1779.21,4375.79) 1779.21,4435 ; 1779.21,4435 cw(c1779.21,4494.21) 1737.34,4452.34 ccw(c1779.21,4494.21) 1779.21,4435 ; 1889.7,4443.78 ccw(c1889.7,4479.23) 1914.77,4454.16 cw(c1889.7,4479.23) 1889.7,4443.78 ; 1889.7,4443.78 cw(c1889.7,4408.33) 1914.77,4433.4 ccw(c1889.7,4408.33) 1889.7,4443.78
NetP13_6: P13.6 R11.2 U4.20 | length 1633.9
  Top Layer w10: P13.6@1720,4535 1828,4535 1840.48,4522.52 U4.20@1949.76,4522.52 ; 1755.07,4535 ccw(c1755.07,4499.93) 1730.27,4524.73 cw(c1755.07,4499.93) 1755.07,4535 ; 1755.07,4535 cw(c1755.07,4570.07) 1730.27,4545.27 ccw(c1755.07,4570.07) 1755.07,4535 ; 1779.21,4535 ccw(c1779.21,4475.79) 1737.34,4517.66 cw(c1779.21,4475.79) 1779.21,4535 ; 1779.21,4535 cw(c1779.21,4594.21) 1737.34,4552.34 ccw(c1779.21,4594.21) 1779.21,4535 ; 1889.7,4522.52 ccw(c1889.7,4557.97) 1914.77,4532.9 cw(c1889.7,4557.97) 1889.7,4522.52 ; 1889.7,4522.52 cw(c1889.7,4487.07) 1914.77,4512.14 ccw(c1889.7,4487.07) 1889.7,4522.52
  Bottom Layer w10: P13.6@1714.64,4533.9 ccw(c1752.3,4541.61) 1742.35,4504.48 ; P13.6@1720,4535 1789.57,4465.43 R11.2@2160,4465.43 ; P13.6@1721.1,4540.36 cw(c1713.39,4502.7) 1750.52,4512.65 ; 1744.8,4510.2 ccw(c1720,4485.4) 1720,4520.47 cw(c1720,4485.4) 1744.8,4510.2 ; 1744.8,4510.2 cw(c1769.6,4535) 1734.53,4535 ccw(c1769.6,4535) 1744.8,4510.2 ; 1761.87,4493.13 ccw(c1720,4451.26) 1720,4510.47 cw(c1720,4451.26) 1761.87,4493.13 ; 1761.87,4493.13 cw(c1803.74,4535) 1744.53,4535 ccw(c1803.74,4535) 1761.87,4493.13 ; 2111.11,4465.43 ccw(c2111.11,4510.39) 2142.9,4478.6 cw(c2111.11,4510.39) 2111.11,4465.43 ; 2111.11,4465.43 cw(c2111.11,4420.48) 2142.9,4452.27 ccw(c2111.11,4420.48) 2111.11,4465.43
NetP13_7: P13.7 U4.21 | length 553.2
  Top Layer w10: P13.7@1708.05,4625.18 ccw(c1741.68,4652.82) 1737.44,4609.49 ; P13.7@1720,4635 1753.74,4601.26 ; P13.7@1729.82,4646.95 cw(c1702.18,4613.32) 1745.51,4617.56 ; U4.21@1949.76,4601.26 1753.74,4601.26 ; 1753.74,4601.26 ccw(c1729.59,4577.12) 1724.01,4610.8 cw(c1729.59,4577.12) 1753.74,4601.26 ; 1753.74,4601.26 cw(c1777.88,4625.41) 1744.2,4630.99 ccw(c1777.88,4625.41) 1753.74,4601.26 ; 1889.7,4601.26 ccw(c1889.7,4636.71) 1914.77,4611.64 cw(c1889.7,4636.71) 1889.7,4601.26 ; 1889.7,4601.26 cw(c1889.7,4565.81) 1914.77,4590.88 ccw(c1889.7,4565.81) 1889.7,4601.26
NetP13_8: P13.8 U4.22 | length 745.2
  Top Layer w10: P13.8@1714.64,4733.9 ccw(c1752.3,4741.61) 1742.35,4704.48 ; P13.8@1720,4735 1775,4680 U4.22@1949.76,4680 ; P13.8@1721.1,4740.36 cw(c1713.39,4702.7) 1750.52,4712.65 ; 1744.8,4710.2 ccw(c1720,4685.4) 1720,4720.47 cw(c1720,4685.4) 1744.8,4710.2 ; 1744.8,4710.2 cw(c1769.6,4735) 1734.53,4735 ccw(c1769.6,4735) 1744.8,4710.2 ; 1761.87,4693.13 ccw(c1720,4651.26) 1720,4710.47 cw(c1720,4651.26) 1761.87,4693.13 ; 1761.87,4693.13 cw(c1803.74,4735) 1744.53,4735 ccw(c1803.74,4735) 1761.87,4693.13 ; 1889.7,4680 ccw(c1889.7,4715.45) 1914.77,4690.38 cw(c1889.7,4715.45) 1889.7,4680 ; 1889.7,4680 cw(c1889.7,4644.55) 1914.77,4669.62 ccw(c1889.7,4644.55) 1889.7,4680
NetP14_3: P14.3 U4.3 | length 619.7
  Top Layer w10: U4.3@2550.16,4522.52 2643,4522.52 2660.48,4540 P14.3@2755,4540 ; 2610.22,4522.52 ccw(c2610.22,4487.07) 2585.15,4512.14 cw(c2610.22,4487.07) 2610.22,4522.52 ; 2610.22,4522.52 cw(c2610.22,4557.97) 2585.15,4532.9 ccw(c2610.22,4557.97) 2610.22,4522.52 ; 2695.79,4540 ccw(c2695.79,4599.21) 2737.66,4557.34 cw(c2695.79,4599.21) 2695.79,4540 ; 2695.79,4540 cw(c2695.79,4480.79) 2737.66,4522.66 ccw(c2695.79,4480.79) 2695.79,4540 ; 2719.93,4540 ccw(c2719.93,4575.07) 2744.73,4550.27 cw(c2719.93,4575.07) 2719.93,4540 ; 2719.93,4540 cw(c2719.93,4504.93) 2744.73,4529.73 ccw(c2719.93,4504.93) 2719.93,4540
NetP14_4: P14.4 U4.4 | length 614
  Top Layer w10: U4.4@2550.16,4443.78 2650,4443.78 2653.78,4440 P14.4@2755,4440 ; 2610.22,4443.78 ccw(c2610.22,4408.33) 2585.15,4433.4 cw(c2610.22,4408.33) 2610.22,4443.78 ; 2610.22,4443.78 cw(c2610.22,4479.23) 2585.15,4454.16 ccw(c2610.22,4479.23) 2610.22,4443.78 ; 2695.79,4440 ccw(c2695.79,4499.21) 2737.66,4457.34 cw(c2695.79,4499.21) 2695.79,4440 ; 2695.79,4440 cw(c2695.79,4380.79) 2737.66,4422.66 ccw(c2695.79,4380.79) 2695.79,4440 ; 2719.93,4440 ccw(c2719.93,4475.07) 2744.73,4450.27 cw(c2719.93,4475.07) 2719.93,4440 ; 2719.93,4440 cw(c2719.93,4404.93) 2744.73,4429.73 ccw(c2719.93,4404.93) 2719.93,4440
NetP14_5: P14.5 U4.5 | length 391
  Top Layer w10: U4.5@2550.16,4365.04 2729.96,4365.04 ; P14.5@2755,4340 2729.96,4365.04 ; 2610.22,4365.04 ccw(c2610.22,4329.59) 2585.15,4354.66 cw(c2610.22,4329.59) 2610.22,4365.04 ; 2610.22,4365.04 cw(c2610.22,4400.49) 2585.15,4375.42 ccw(c2610.22,4400.49) 2610.22,4365.04 ; 2729.96,4365.04 ccw(c2739.36,4374.44) 2744.86,4362.33 cw(c2739.36,4374.44) 2729.96,4365.04 ; 2729.96,4365.04 cw(c2720.56,4355.64) 2732.67,4350.14 ccw(c2720.56,4355.64) 2729.96,4365.04
NetP14_6: P14.6 U4.6 | length 716.7
  Top Layer w10: U4.6@2550.16,4286.3 2708.7,4286.3 P14.6@2755,4240 ; 2724.48,4262.35 ccw(c2761.61,4272.3) P14.6@2753.9,4234.64 ; 2732.65,4270.52 cw(c2722.7,4233.39) P14.6@2760.36,4241.1 ; 2610.22,4286.3 ccw(c2610.22,4250.85) 2585.15,4275.92 cw(c2610.22,4250.85) 2610.22,4286.3 ; 2610.22,4286.3 cw(c2610.22,4321.75) 2585.15,4296.68 ccw(c2610.22,4321.75) 2610.22,4286.3 ; 2713.13,4281.87 ccw(c2755,4323.74) 2755,4264.53 cw(c2755,4323.74) 2713.13,4281.87 ; 2713.13,4281.87 cw(c2671.26,4240) 2730.47,4240 ccw(c2671.26,4240) 2713.13,4281.87 ; 2730.2,4264.8 ccw(c2755,4289.6) 2755,4254.53 cw(c2755,4289.6) 2730.2,4264.8 ; 2730.2,4264.8 cw(c2705.4,4240) 2740.47,4240 ccw(c2705.4,4240) 2730.2,4264.8
NetP14_7: P14.7 R14.2 U4.7 | length 1660.2
  Top Layer w10: U4.7@2550.16,4207.56 2687.44,4207.56 P14.7@2755,4140 ; 2724.48,4162.35 ccw(c2761.61,4172.3) P14.7@2753.9,4134.64 ; 2732.65,4170.52 cw(c2722.7,4133.39) P14.7@2760.36,4141.1 ; 2610.22,4207.56 ccw(c2610.22,4172.11) 2585.15,4197.18 cw(c2610.22,4172.11) 2610.22,4207.56 ; 2610.22,4207.56 cw(c2610.22,4243.01) 2585.15,4217.94 ccw(c2610.22,4243.01) 2610.22,4207.56 ; 2713.13,4181.87 ccw(c2755,4223.74) 2755,4164.53 cw(c2755,4223.74) 2713.13,4181.87 ; 2713.13,4181.87 cw(c2671.26,4140) 2730.47,4140 ccw(c2671.26,4140) 2713.13,4181.87 ; 2730.2,4164.8 ccw(c2755,4189.6) 2755,4154.53 cw(c2755,4189.6) 2730.2,4164.8 ; 2730.2,4164.8 cw(c2705.4,4140) 2740.47,4140 ccw(c2705.4,4140) 2730.2,4164.8
  Bottom Layer w10: R14.2@2370,4205.43 2689.57,4205.43 P14.7@2755,4140 ; 2724.48,4162.35 ccw(c2761.61,4172.3) P14.7@2753.9,4134.64 ; 2732.65,4170.52 cw(c2722.7,4133.39) P14.7@2760.36,4141.1 ; 2418.89,4205.43 ccw(c2418.89,4160.48) 2387.1,4192.27 cw(c2418.89,4160.48) 2418.89,4205.43 ; 2418.89,4205.43 cw(c2418.89,4250.39) 2387.1,4218.6 ccw(c2418.89,4250.39) 2418.89,4205.43 ; 2713.13,4181.87 ccw(c2755,4223.74) 2755,4164.53 cw(c2755,4223.74) 2713.13,4181.87 ; 2713.13,4181.87 cw(c2671.26,4140) 2730.47,4140 ccw(c2671.26,4140) 2713.13,4181.87 ; 2730.2,4164.8 ccw(c2755,4189.6) 2755,4154.53 cw(c2755,4189.6) 2730.2,4164.8 ; 2730.2,4164.8 cw(c2705.4,4140) 2740.47,4140 ccw(c2705.4,4140) 2730.2,4164.8
NetP15_3: P15.3 R12.2 | length 748.2
  Bottom Layer w10: P15.3@1174.64,2956.1 cw(c1212.3,2948.38) 1202.35,2985.51 ; P15.3@1180,2955 1225,3000 1295,3000 1325,3030 R12.2@1374.57,3030 ; P15.3@1181.1,2949.64 ccw(c1173.39,2987.29) 1210.52,2977.35 ; 1204.8,2979.8 ccw(c1229.6,2955) 1194.53,2955 cw(c1229.6,2955) 1204.8,2979.8 ; 1204.8,2979.8 cw(c1180,3004.6) 1180,2969.53 ccw(c1180,3004.6) 1204.8,2979.8 ; 1221.87,2996.87 ccw(c1263.74,2955) 1204.53,2955 cw(c1263.74,2955) 1221.87,2996.87 ; 1221.87,2996.87 cw(c1180,3038.74) 1180,2979.53 ccw(c1180,3038.74) 1221.87,2996.87 ; 1329.61,3030 ccw(c1329.61,3074.96) 1361.4,3043.17 cw(c1329.61,3074.96) 1329.61,3030 ; 1329.61,3030 cw(c1329.61,2985.04) 1361.4,3016.83 ccw(c1329.61,2985.04) 1329.61,3030
NetP15_4: P15.4 R13.1 | length 1018.8
  Bottom Layer w10: P15.4@1266.26,2947.88 ccw(c1302.17,2966.49) 1291.98,2927.35 ; P15.4@1275.14,2952.48 ccw(c1329.01,2980.4) 1313.71,2921.69 ; P15.4@1280,2955 1304.57,2955 1379.57,2880 ; P15.4@1284.02,2957.08 ccw(c1355.84,2994.31) 1335.45,2916.03 ; P15.4@1284.21,2956.68 ccw(c1322.92,2972.12) 1312.13,2931.86 ; P15.4@1293.49,2960.38 ccw(c1346.04,2981.35) 1331.4,2926.7 ; P15.4@1294.32,2957.45 ccw(c1312.01,2960.47) 1307.36,2943.14 ; R13.1@1379.57,2845 1379.57,2880 ; 1379.57,2880 ccw(c1396.16,2880) 1388.34,2865.36 cw(c1396.16,2880) 1379.57,2880 ; 1379.57,2880 cw(c1362.97,2880) 1370.79,2865.36 ccw(c1362.97,2880) 1379.57,2880 ; P15.4@1280,2930.47 cw(c1280,2811.94) 1363.81,2895.75 ccw(c1280,2811.94) P15.4@1280,2930.47 ; P15.4@1280,2940.47 cw(c1280,2846.08) 1346.74,2912.82 ccw(c1280,2846.08) P15.4@1280,2940.47 ; P15.4@1280,2950.47 cw(c1280,2880.22) 1329.67,2929.9 ccw(c1280,2880.22) P15.4@1280,2950.47 ; P15.4@1280,2960.47 cw(c1280,2914.37) 1312.6,2946.97 ccw(c1280,2914.37) P15.4@1280,2960.47
NetP16_1: P16.1 U4.9 | length 681
  Top Layer w10: P16.1@2309.64,3901.1 cw(c2347.3,3893.39) 2337.35,3930.52 ; P16.1@2315,3900 2446.81,4031.81 ; P16.1@2316.1,3894.64 ccw(c2308.39,3932.3) 2345.52,3922.35 ; U4.9@2446.81,4069.76 2446.81,4031.81 ; P16.1@2339.8,3924.8 ccw(c2364.6,3900) 2329.53,3900 cw(c2364.6,3900) P16.1@2339.8,3924.8 ; P16.1@2339.8,3924.8 cw(c2315,3949.6) 2315,3914.53 ccw(c2315,3949.6) P16.1@2339.8,3924.8 ; 2356.87,3941.87 ccw(c2398.74,3900) 2339.53,3900 cw(c2398.74,3900) 2356.87,3941.87 ; 2356.87,3941.87 cw(c2315,3983.74) 2315,3924.53 ccw(c2315,3983.74) 2356.87,3941.87 ; 2446.81,4031.81 ccw(c2427.25,4031.81) 2438.42,4047.87 cw(c2427.25,4031.81) 2446.81,4031.81 ; 2446.81,4031.81 cw(c2466.37,4031.81) 2455.2,4047.87 ccw(c2466.37,4031.81) 2446.81,4031.81
NetP16_2: P16.2 U4.10 | length 683.5
  Top Layer w10: P16.2@2209.64,3901.1 cw(c2247.3,3893.39) 2237.35,3930.52 ; P16.2@2215,3900 2350.07,4035.07 2368.07,4035.07 ; P16.2@2216.1,3894.64 ccw(c2208.39,3932.3) 2245.52,3922.35 ; U4.10@2368.07,4069.76 2368.07,4035.07 ; 2239.8,3924.8 ccw(c2264.6,3900) 2229.53,3900 cw(c2264.6,3900) 2239.8,3924.8 ; 2239.8,3924.8 cw(c2215,3949.6) 2215,3914.53 ccw(c2215,3949.6) 2239.8,3924.8 ; 2256.87,3941.87 ccw(c2298.74,3900) 2239.53,3900 cw(c2298.74,3900) 2256.87,3941.87 ; 2256.87,3941.87 cw(c2215,3983.74) 2215,3924.53 ccw(c2215,3983.74) 2256.87,3941.87 ; 2368.07,4035.07 ccw(c2354.39,4035.07) 2360.99,4047.06 cw(c2354.39,4035.07) 2368.07,4035.07 ; 2368.07,4035.07 cw(c2381.75,4035.07) 2375.15,4047.06 ccw(c2381.75,4035.07) 2368.07,4035.07
NetP16_3: P16.3 U4.11 | length 1045.3
  Top Layer w10: P16.3@2109.64,3901.1 cw(c2147.3,3893.39) 2137.35,3930.52 ; P16.3@2115,3900 2157,3942 2191.33,3942 2289.33,4040 ; P16.3@2116.1,3894.64 ccw(c2108.39,3932.3) 2145.52,3922.35 ; 2263.84,4019.59 cw(c2321.54,4004.13) U4.11@2291.67,4055.86 ; U4.11@2270.09,4042.91 cw(c2304.47,4033.7) U4.11@2286.67,4064.52 ; U4.11@2276.61,4052.58 cw(c2259.29,4042.58) 2278.61,4037.4 ; U4.11@2289.33,4069.76 2289.33,4040 ; 2139.8,3924.8 ccw(c2164.6,3900) 2129.53,3900 cw(c2164.6,3900) 2139.8,3924.8 ; 2139.8,3924.8 cw(c2115,3949.6) 2115,3914.53 ccw(c2115,3949.6) 2139.8,3924.8 ; 2156.87,3941.87 ccw(c2198.74,3900) 2139.53,3900 cw(c2198.74,3900) 2156.87,3941.87 ; 2156.87,3941.87 cw(c2115,3983.74) 2115,3924.53 ccw(c2115,3983.74) 2156.87,3941.87 ; 2289.33,4040 ccw(c2283.16,4040) 2284.99,4045.89 cw(c2283.16,4040) 2289.33,4040 ; 2289.33,4040 cw(c2295.5,4040) 2293.67,4045.89 ccw(c2295.5,4040) 2289.33,4040 ; 2250.17,4000.84 ccw(c2191.1,4059.92) 2274.64,4059.92 cw(c2191.1,4059.92) 2250.17,4000.84 ; 2267.25,4017.92 ccw(c2225.24,4059.92) 2284.64,4059.92 cw(c2225.24,4059.92) 2267.25,4017.92 ; 2284.32,4034.99 ccw(c2259.38,4059.92) 2294.64,4059.92 cw(c2259.38,4059.92) 2284.32,4034.99
NetP16_4: P16.4 U4.12 | length 929.8
  Top Layer w10: P16.4@2009.64,3901.1 cw(c2047.3,3893.39) 2037.35,3930.52 ; P16.4@2015,3900 2074.49,3959.49 2124.49,3959.49 2210.59,4045.59 U4.12@2210.59,4069.76 ; P16.4@2016.1,3894.64 ccw(c2008.39,3932.3) 2045.52,3922.35 ; 2185.96,4022.79 cw(c2236.21,4009.32) U4.12@2212.71,4055.74 ; U4.12@2191.75,4044.41 cw(c2222.63,4036.14) U4.12@2208.19,4064.66 ; U4.12@2197.87,4052.58 cw(c2180.55,4042.58) 2199.87,4037.4 ; 2039.8,3924.8 ccw(c2064.6,3900) 2029.53,3900 cw(c2064.6,3900) 2039.8,3924.8 ; 2039.8,3924.8 cw(c2015,3949.6) 2015,3914.53 ccw(c2015,3949.6) 2039.8,3924.8 ; 2056.87,3941.87 ccw(c2098.74,3900) 2039.53,3900 cw(c2098.74,3900) 2056.87,3941.87 ; 2056.87,3941.87 cw(c2015,3983.74) 2015,3924.53 ccw(c2015,3983.74) 2056.87,3941.87 ; 2175.39,4010.39 ccw(c2125.85,4059.92) 2195.91,4059.92 cw(c2125.85,4059.92) 2175.39,4010.39 ; 2192.46,4027.46 ccw(c2160,4059.92) 2205.91,4059.92 cw(c2160,4059.92) 2192.46,4027.46
NetP16_5: P16.5 U4.13 | length 1162.7
  Top Layer w10: P16.5@1909.64,3901.1 cw(c1947.3,3893.39) 1937.35,3930.52 ; P16.5@1915,3900 2000,3985 2080,3985 2131.85,4036.85 ; P16.5@1916.1,3894.64 ccw(c1908.39,3932.3) 1945.52,3922.35 ; 2106.36,4019.59 cw(c2164.06,4004.13) U4.13@2134.19,4055.86 ; U4.13@2112.61,4042.91 cw(c2146.99,4033.7) U4.13@2129.19,4064.52 ; U4.13@2119.13,4052.58 cw(c2101.81,4042.58) 2121.13,4037.4 ; U4.13@2122.05,4040.84 cw(c2145.03,4034.68) U4.13@2134.02,4055.77 ; U4.13@2131.85,4069.76 2131.85,4036.85 ; 1939.8,3924.8 ccw(c1964.6,3900) 1929.53,3900 cw(c1964.6,3900) 1939.8,3924.8 ; 1939.8,3924.8 cw(c1915,3949.6) 1915,3914.53 ccw(c1915,3949.6) 1939.8,3924.8 ; 1956.87,3941.87 ccw(c1998.74,3900) 1939.53,3900 cw(c1998.74,3900) 1956.87,3941.87 ; 1956.87,3941.87 cw(c1915,3983.74) 1915,3924.53 ccw(c1915,3983.74) 1956.87,3941.87 ; 2131.85,4036.85 ccw(c2121.07,4036.85) 2125.63,4046.62 cw(c2121.07,4036.85) 2131.85,4036.85 ; 2131.85,4036.85 cw(c2142.63,4036.85) 2138.07,4046.62 ccw(c2142.63,4036.85) 2131.85,4036.85 ; 2090.47,3995.47 ccw(c2026.01,4059.92) 2117.16,4059.92 cw(c2026.01,4059.92) 2090.47,3995.47 ; 2107.54,4012.54 ccw(c2060.15,4059.92) 2127.16,4059.92 cw(c2060.15,4059.92) 2107.54,4012.54 ; 2124.61,4029.61 ccw(c2094.3,4059.92) 2137.16,4059.92 cw(c2094.3,4059.92) 2124.61,4029.61
NetP16_6: P16.6 U4.14 | length 996.3
  Top Layer w10: P16.6@1809.64,3901.1 cw(c1847.3,3893.39) 1837.35,3930.52 ; P16.6@1815,3900 1975,4060 ; P16.6@1816.1,3894.64 ccw(c1808.39,3932.3) 1845.52,3922.35 ; U4.14@2053.11,4069.76 U4.14@2053.11,4060 ; 1839.8,3924.8 ccw(c1864.6,3900) 1829.53,3900 cw(c1864.6,3900) 1839.8,3924.8 ; 1839.8,3924.8 cw(c1815,3949.6) 1815,3914.53 ccw(c1815,3949.6) 1839.8,3924.8 ; 1856.87,3941.87 ccw(c1898.74,3900) 1839.53,3900 cw(c1898.74,3900) 1856.87,3941.87 ; 1856.87,3941.87 cw(c1815,3983.74) 1815,3924.53 ccw(c1815,3983.74) 1856.87,3941.87 ; 1975,4060 U4.14@2053.11,4060 ; 1975,4060 U4.14@2053.11,4060 ; 2017.47,4060 cw(c2017.47,4024.28) U4.14@2042.73,4049.54 ; 2017.47,4060 cw(c2017.47,4024.28) U4.14@2042.73,4049.54 ; 2017.47,4060 cw(c2017.47,4024.28) U4.14@2042.73,4049.54 ; 2017.47,4060 cw(c2017.47,4024.28) U4.14@2042.73,4049.54 ; 2017.85,4060 ccw(c2017.85,4095.18) U4.14@2042.73,4070.31 ; 2017.85,4060 ccw(c2017.85,4095.18) U4.14@2042.73,4070.31 ; 2017.85,4060 ccw(c2017.85,4095.18) U4.14@2042.73,4070.31 ; 2017.85,4060 ccw(c2017.85,4095.18) U4.14@2042.73,4070.31
NetQ1_1: Q1.1 R25.1 | length 817.3
  Top Layer w10: Q1.1@3565,4197.4 3682.4,4197.4 3725,4240 3725,4535 3770,4580 3770,4629.57 ; 3592.27,4197.4 ccw(c3592.27,4180.96) 3580.64,4192.59 cw(c3592.27,4180.96) 3592.27,4197.4 ; 3592.27,4197.4 cw(c3592.27,4213.85) 3580.64,4202.22 ccw(c3592.27,4213.85) 3592.27,4197.4 ; 3770,4629.55 ccw(c3762.01,4629.55) 3764.73,4637.06 cw(c3762.01,4629.55) 3770,4629.55 ; 3770,4629.55 cw(c3777.12,4629.55) 3775.45,4636.47 ccw(c3777.12,4629.55) 3770,4629.55 ; R25.1@3757.9,4641.4 cw(c3728.67,4612.18) 3770,4612.18 ccw(c3728.67,4612.18) R25.1@3757.9,4641.4 ; 3770,4607.04 cw(c3818.59,4607.04) 3784.23,4641.4 ccw(c3818.59,4607.04) 3770,4607.04
NetQ1_2: Q1.2 R30.1 | length 510.1
  Top Layer w10: Q1.2@3565,4122.6 3716.97,4122.6 3759.57,4080 R30.1@3759.57,3975 ; 3592.27,4122.6 ccw(c3592.27,4106.15) 3580.64,4117.78 cw(c3592.27,4106.15) 3592.27,4122.6 ; 3592.27,4122.6 cw(c3592.27,4139.04) 3580.64,4127.41 ccw(c3592.27,4139.04) 3592.27,4122.6 ; 3759.57,4023.89 ccw(c3804.53,4023.89) 3772.74,3992.1 cw(c3804.53,4023.89) 3759.57,4023.89 ; 3759.57,4023.89 cw(c3714.61,4023.89) 3746.4,3992.1 ccw(c3714.61,4023.89) 3759.57,4023.89
NetQ2_2: Q2.2 R31.1 | length 598
  Top Layer w10: Q2.2@4037.4,3935.71 Q2.2@4037.4,3942.36 ; R31.1@4160,3924.57 4127.81,3924.57 ; Q2.2@4037.4,3942.36 4110.01,3942.36 ; Q2.2@4037.4,3942.36 4110.01,3942.36 ; Q2.2@4042.22,3951.35 ccw(c4063.91,3973.05) 4063.91,3942.36 ; Q2.2@4042.22,3951.35 ccw(c4063.91,3973.05) 4063.91,3942.36 ; Q2.2@4042.22,3951.35 ccw(c4063.91,3973.05) 4063.91,3942.36 ; Q2.2@4042.22,3951.35 ccw(c4063.91,3973.05) 4063.91,3942.36 ; 4110.02,3942.36 ccw(c4129.16,3961.51) 4145.1,3939.62 cw(c4129.16,3961.51) 4110.02,3942.36 ; 4110.01,3942.36 4127.81,3924.57 ; 4127.81,3924.57 ccw(c4127.81,3936.69) 4138.95,3931.91 cw(c4127.81,3936.69) 4127.81,3924.57 ; 4127.81,3924.57 cw(c4127.81,3912.45) 4138.95,3917.23 ccw(c4127.81,3912.45) 4127.81,3924.57 ; Q2.2@4043.18,3942.93 cw(c4049.16,3939.21) 4052.68,3945.31 ccw(c4049.16,3939.21) Q2.2@4043.18,3942.93 ; 4118.28,3934.09 ccw(c4136.13,3951.94) 4150.99,3931.54 cw(c4136.13,3951.94) 4118.28,3934.09 ; 4126.55,3925.82 ccw(c4143.1,3942.37) 4156.87,3923.45 cw(c4143.1,3942.37) 4126.55,3925.82
NetQ2_3: Q2.3 R30.2 U8.14 | length 847.7
  Top Layer w10: R30.2@3830.43,3975 3890,3975 3939.29,4024.29 Q2.3@4000,4024.29 4000,4052 3990,4062 v1(3905,4062) ; 3875.39,3975 ccw(c3875.39,3930.04) 3843.6,3961.83 cw(c3875.39,3930.04) 3875.39,3975 ; 3875.39,3975 cw(c3875.39,4019.96) 3843.6,3988.17 ccw(c3875.39,4019.96) 3875.39,3975 ; 3926.2,4062 ccw(c3926.2,4040.8) 3911.21,4055.79 cw(c3926.2,4040.8) 3926.2,4062 ; 3926.2,4062 cw(c3926.2,4083.2) 3911.21,4068.21 ccw(c3926.2,4083.2) 3926.2,4062 ; 3983.56,4024.29 ccw(c3983.56,4040.74) 3995.18,4029.11 cw(c3983.56,4040.74) 3983.56,4024.29 ; 3983.56,4024.29 cw(c3983.56,4007.85) 3995.18,4019.48 ccw(c3983.56,4007.85) 3983.56,4024.29 ; 4000,4051.56 ccw(c4016.44,4051.56) 4004.82,4039.93 cw(c4016.44,4051.56) 4000,4051.56 ; 4000,4051.56 cw(c3983.56,4051.56) 3995.18,4039.93 ccw(c3983.56,4051.56) 4000,4051.56
  Bottom Layer w10: v1(3905,4062) U8.14@3905,4148.54 ; 3905,4083.2 ccw(c3926.2,4083.2) 3911.21,4068.21 cw(c3926.2,4083.2) 3905,4083.2 ; 3905,4083.2 cw(c3883.8,4083.2) 3898.79,4068.21 ccw(c3883.8,4083.2) 3905,4083.2 ; 3905,4091.92 ccw(c3883.8,4091.92) 3898.79,4106.9 cw(c3883.8,4091.92) 3905,4091.92 ; 3905,4091.92 cw(c3926.2,4091.92) 3911.21,4106.9 ccw(c3926.2,4091.92) 3905,4091.92
NetR16_1: R16.1 U5.8 | length 1268.2
  Top Layer w10: U5.8@1329.64,2271.1 cw(c1367.3,2263.39) 1357.35,2300.52 ; U5.8@1335,2270 1395,2330 1555,2330 1625,2260 1829.57,2260 R16.1@1909.57,2180 ; U5.8@1336.1,2264.64 ccw(c1328.39,2302.3) 1365.52,2292.35 ; 1886.1,2208.85 cw(c1877,2174.85) R16.1@1910.9,2184.31 ; 1359.8,2294.8 ccw(c1384.6,2270) 1349.53,2270 cw(c1384.6,2270) 1359.8,2294.8 ; 1359.8,2294.8 cw(c1335,2319.6) 1335,2284.53 ccw(c1335,2319.6) 1359.8,2294.8 ; 1376.87,2311.87 ccw(c1418.74,2270) 1359.53,2270 cw(c1418.74,2270) 1376.87,2311.87 ; 1376.87,2311.87 cw(c1335,2353.74) 1335,2294.53 ccw(c1335,2353.74) 1376.87,2311.87 ; 1871.06,2218.51 ccw(c1909.57,2257.02) 1909.57,2202.56 cw(c1909.57,2257.02) 1871.06,2218.51 ; 1880.56,2209.01 cw(c1855.49,2183.94) 1890.95,2183.94 ccw(c1855.49,2183.94) 1880.56,2209.01 ; R16.1@1888.13,2201.44 ccw(c1909.57,2222.88) 1909.57,2192.56 cw(c1909.57,2222.88) R16.1@1888.13,2201.44